# Altium PCB AVR精简学习板.PcbDoc (part 9 of 10)
Units mm, origin at the board's own origin, x right, y up, seen from the top; angles counter-clockwise.
Board outline 152.4 x 101.6 mm, 2 copper layers (Top Layer, Bottom Layer); 44 components, 51 nets, 211 pads, 6 vias.
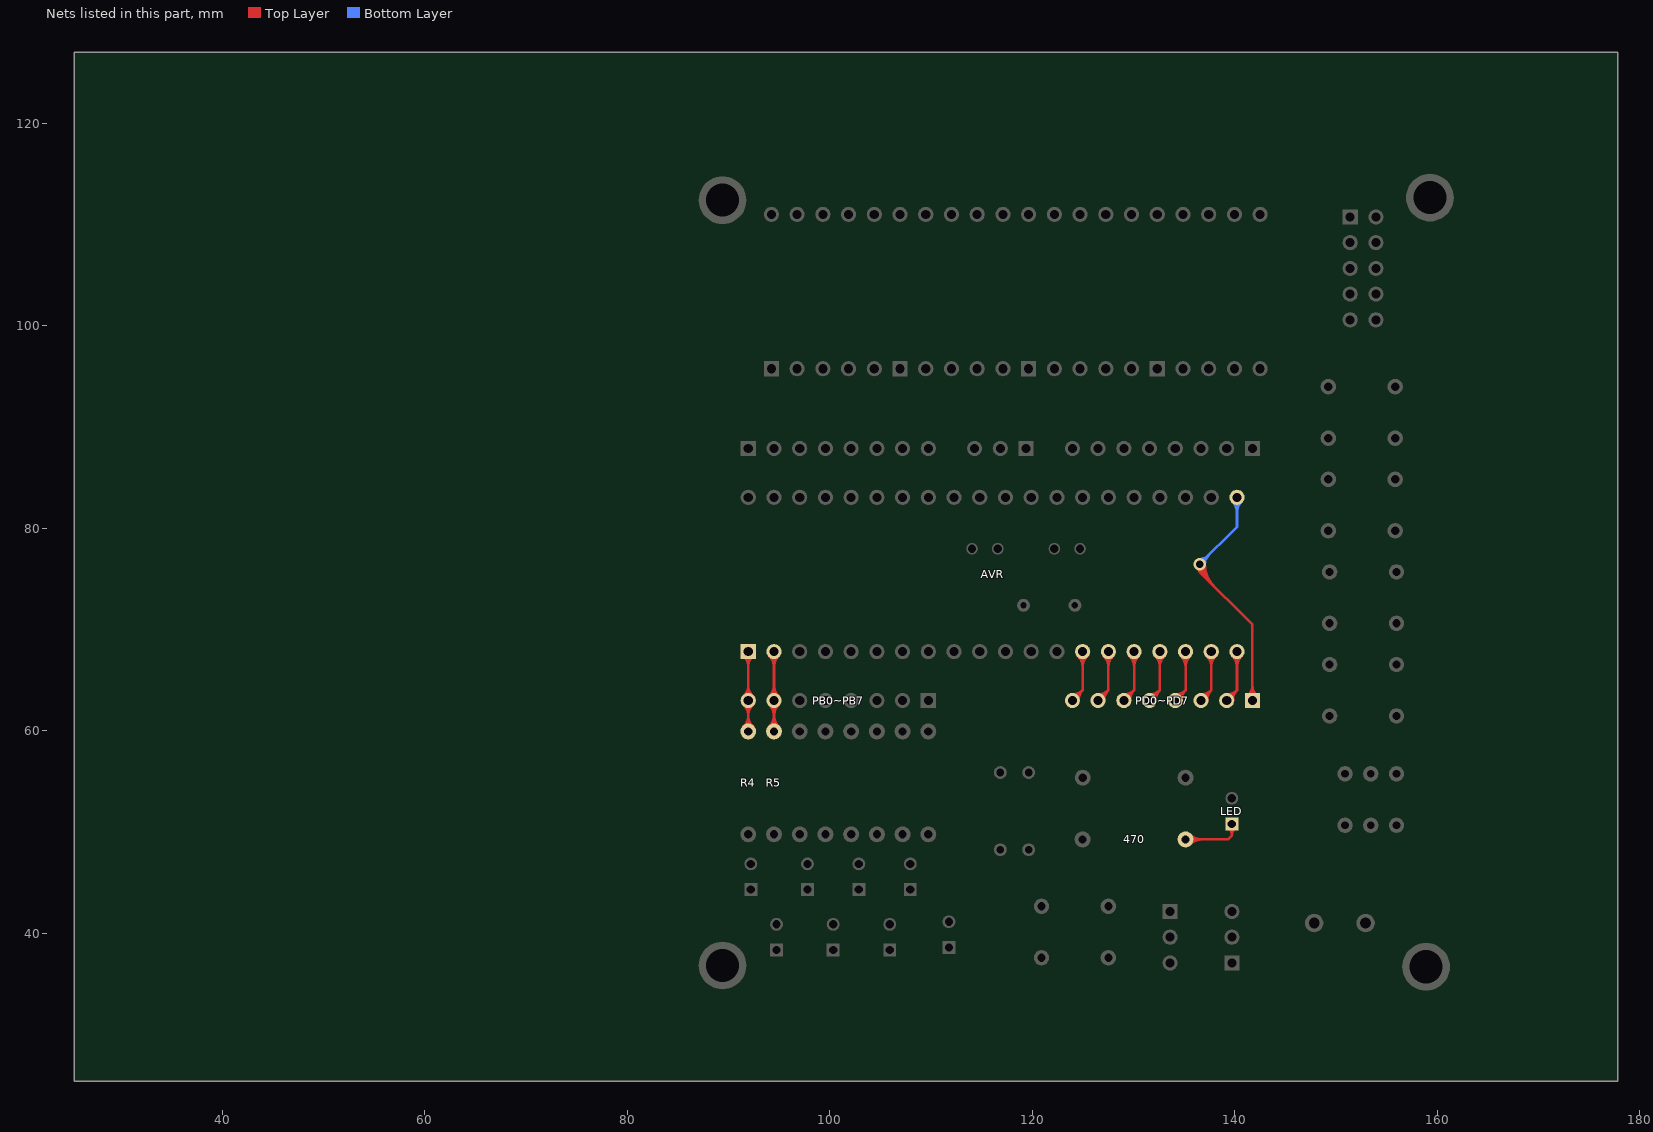
[diagram p9: the nets of this part, all layers, seen from the top]

## Via types
v1: diameter 1.27, hole 0.711, Top Layer to Bottom Layer, 6 vias

## Nets (pads, with @x,y where several pads share a name; then routed paths per layer and width w, separated by ;. In a path a pad name is that pad's centre, name@x,y a point inside that pad or via, vN(x,y) a via of type N, cw(c..) or ccw(c..) an arc to the next point about the centre after c; other vN are vias at no path point) (continued)
NetJP2_7: AVR.2 PB0~PB7.7 R5.2 | length 115.2
  Top Layer w0.254: AVR.2@94.488,67.818 PB0~PB7.7@94.488,62.992 PB0~PB7.7@94.488,62.992 R5.2@94.489,59.94 ; R5.2@94.022,60.407 ccw(c92.895,61.535) 94.489,61.535 ; R5.2@94.022,60.407 ccw(c92.895,61.535) 94.489,61.535 ; R5.2@94.022,60.407 ccw(c92.895,61.535) 94.489,61.535 ; R5.2@94.022,60.407 ccw(c92.895,61.535) 94.489,61.535 ; R5.2@94.022,60.407 ccw(c92.895,61.535) 94.489,61.535 ; R5.2@94.022,60.407 ccw(c92.895,61.535) 94.489,61.535 ; R5.2@94.022,60.407 ccw(c92.895,61.535) 94.489,61.535 ; PB0~PB7.7@94.047,62.551 cw(c92.982,61.486) 94.489,61.486 ; PB0~PB7.7@94.047,62.551 cw(c92.982,61.486) 94.489,61.486 ; PB0~PB7.7@94.047,62.551 cw(c92.982,61.486) 94.489,61.486 ; PB0~PB7.7@94.047,62.551 cw(c92.982,61.486) 94.489,61.486 ; PB0~PB7.7@94.047,62.551 cw(c92.982,61.486) 94.489,61.486 ; PB0~PB7.7@94.047,62.551 cw(c92.982,61.486) 94.489,61.486 ; PB0~PB7.7@94.047,62.551 cw(c92.982,61.486) 94.489,61.486 ; PB0~PB7.7@94.047,63.433 ccw(c92.984,64.496) 94.488,64.496 ; PB0~PB7.7@94.047,63.433 ccw(c92.984,64.496) 94.488,64.496 ; PB0~PB7.7@94.047,63.433 ccw(c92.984,64.496) 94.488,64.496 ; PB0~PB7.7@94.047,63.433 ccw(c92.984,64.496) 94.488,64.496 ; PB0~PB7.7@94.047,63.433 ccw(c92.984,64.496) 94.488,64.496 ; PB0~PB7.7@94.047,63.433 ccw(c92.984,64.496) 94.488,64.496 ; PB0~PB7.7@94.047,63.433 ccw(c92.984,64.496) 94.488,64.496 ; AVR.2@94.047,67.377 cw(c92.984,66.314) 94.488,66.314 ; AVR.2@94.047,67.377 cw(c92.984,66.314) 94.488,66.314 ; AVR.2@94.047,67.377 cw(c92.984,66.314) 94.488,66.314 ; AVR.2@94.047,67.377 cw(c92.984,66.314) 94.488,66.314 ; AVR.2@94.047,67.377 cw(c92.984,66.314) 94.488,66.314 ; AVR.2@94.047,67.377 cw(c92.984,66.314) 94.488,66.314 ; AVR.2@94.047,67.377 cw(c92.984,66.314) 94.488,66.314 ; R5.2@94.202,60.228 ccw(c93.508,60.921) 94.489,60.921 ; R5.2@94.202,60.228 ccw(c93.508,60.921) 94.489,60.921 ; R5.2@94.202,60.228 ccw(c93.508,60.921) 94.489,60.921 ; R5.2@94.202,60.228 ccw(c93.508,60.921) 94.489,60.921 ; R5.2@94.202,60.228 ccw(c93.508,60.921) 94.489,60.921 ; R5.2@94.202,60.228 ccw(c93.508,60.921) 94.489,60.921 ; R5.2@94.202,60.228 ccw(c93.508,60.921) 94.489,60.921 ; PB0~PB7.7@94.227,62.731 cw(c93.595,62.099) 94.489,62.099 ; PB0~PB7.7@94.227,62.731 cw(c93.595,62.099) 94.489,62.099 ; PB0~PB7.7@94.227,62.731 cw(c93.595,62.099) 94.489,62.099 ; PB0~PB7.7@94.227,62.731 cw(c93.595,62.099) 94.489,62.099 ; PB0~PB7.7@94.227,62.731 cw(c93.595,62.099) 94.489,62.099 ; PB0~PB7.7@94.227,62.731 cw(c93.595,62.099) 94.489,62.099 ; PB0~PB7.7@94.227,62.731 cw(c93.595,62.099) 94.489,62.099 ; PB0~PB7.7@94.227,63.253 ccw(c93.597,63.883) 94.488,63.883 ; PB0~PB7.7@94.227,63.253 ccw(c93.597,63.883) 94.488,63.883 ; PB0~PB7.7@94.227,63.253 ccw(c93.597,63.883) 94.488,63.883 ; PB0~PB7.7@94.227,63.253 ccw(c93.597,63.883) 94.488,63.883 ; PB0~PB7.7@94.227,63.253 ccw(c93.597,63.883) 94.488,63.883 ; PB0~PB7.7@94.227,63.253 ccw(c93.597,63.883) 94.488,63.883 ; PB0~PB7.7@94.227,63.253 ccw(c93.597,63.883) 94.488,63.883 ; AVR.2@94.227,67.557 cw(c93.597,66.927) 94.488,66.927 ; AVR.2@94.227,67.557 cw(c93.597,66.927) 94.488,66.927 ; AVR.2@94.227,67.557 cw(c93.597,66.927) 94.488,66.927 ; AVR.2@94.227,67.557 cw(c93.597,66.927) 94.488,66.927 ; AVR.2@94.227,67.557 cw(c93.597,66.927) 94.488,66.927 ; AVR.2@94.227,67.557 cw(c93.597,66.927) 94.488,66.927 ; AVR.2@94.227,67.557 cw(c93.597,66.927) 94.488,66.927 ; 94.488,63.883 ccw(c95.379,63.883) PB0~PB7.7@94.749,63.253 ; 94.488,63.883 ccw(c95.379,63.883) PB0~PB7.7@94.749,63.253 ; 94.488,63.883 ccw(c95.379,63.883) PB0~PB7.7@94.749,63.253 ; 94.488,63.883 ccw(c95.379,63.883) PB0~PB7.7@94.749,63.253 ; 94.488,63.883 ccw(c95.379,63.883) PB0~PB7.7@94.749,63.253 ; 94.488,63.883 ccw(c95.379,63.883) PB0~PB7.7@94.749,63.253 ; 94.488,63.883 ccw(c95.379,63.883) PB0~PB7.7@94.749,63.253 ; 94.488,64.496 ccw(c95.992,64.496) PB0~PB7.7@94.929,63.433 ; 94.488,64.496 ccw(c95.992,64.496) PB0~PB7.7@94.929,63.433 ; 94.488,64.496 ccw(c95.992,64.496) PB0~PB7.7@94.929,63.433 ; 94.488,64.496 ccw(c95.992,64.496) PB0~PB7.7@94.929,63.433 ; 94.488,64.496 ccw(c95.992,64.496) PB0~PB7.7@94.929,63.433 ; 94.488,64.496 ccw(c95.992,64.496) PB0~PB7.7@94.929,63.433 ; 94.488,64.496 ccw(c95.992,64.496) PB0~PB7.7@94.929,63.433 ; 94.488,66.314 cw(c95.992,66.314) AVR.2@94.929,67.377 ; 94.488,66.314 cw(c95.992,66.314) AVR.2@94.929,67.377 ; 94.488,66.314 cw(c95.992,66.314) AVR.2@94.929,67.377 ; 94.488,66.314 cw(c95.992,66.314) AVR.2@94.929,67.377 ; 94.488,66.314 cw(c95.992,66.314) AVR.2@94.929,67.377 ; 94.488,66.314 cw(c95.992,66.314) AVR.2@94.929,67.377 ; 94.488,66.314 cw(c95.992,66.314) AVR.2@94.929,67.377 ; 94.488,66.927 cw(c95.379,66.927) AVR.2@94.749,67.557 ; 94.488,66.927 cw(c95.379,66.927) AVR.2@94.749,67.557 ; 94.488,66.927 cw(c95.379,66.927) AVR.2@94.749,67.557 ; 94.488,66.927 cw(c95.379,66.927) AVR.2@94.749,67.557 ; 94.488,66.927 cw(c95.379,66.927) AVR.2@94.749,67.557 ; 94.488,66.927 cw(c95.379,66.927) AVR.2@94.749,67.557 ; 94.488,66.927 cw(c95.379,66.927) AVR.2@94.749,67.557 ; 94.489,60.921 ccw(c95.47,60.921) R5.2@94.776,60.228 ; 94.489,60.921 ccw(c95.47,60.921) R5.2@94.776,60.228 ; 94.489,60.921 ccw(c95.47,60.921) R5.2@94.776,60.228 ; 94.489,60.921 ccw(c95.47,60.921) R5.2@94.776,60.228 ; 94.489,60.921 ccw(c95.47,60.921) R5.2@94.776,60.228 ; 94.489,60.921 ccw(c95.47,60.921) R5.2@94.776,60.228 ; 94.489,60.921 ccw(c95.47,60.921) R5.2@94.776,60.228 ; 94.489,61.49 cw(c95.99,61.49) PB0~PB7.7@94.929,62.551 ; 94.489,61.49 cw(c95.99,61.49) PB0~PB7.7@94.929,62.551 ; 94.489,61.49 cw(c95.99,61.49) PB0~PB7.7@94.929,62.551 ; 94.489,61.49 cw(c95.99,61.49) PB0~PB7.7@94.929,62.551 ; 94.489,61.49 cw(c95.99,61.49) PB0~PB7.7@94.929,62.551 ; 94.489,61.49 cw(c95.99,61.49) PB0~PB7.7@94.929,62.551 ; 94.489,61.49 cw(c95.99,61.49) PB0~PB7.7@94.929,62.551 ; 94.489,61.535 ccw(c96.083,61.535) R5.2@94.956,60.407 ; 94.489,61.535 ccw(c96.083,61.535) R5.2@94.956,60.407 ; 94.489,61.535 ccw(c96.083,61.535) R5.2@94.956,60.407 ; 94.489,61.535 ccw(c96.083,61.535) R5.2@94.956,60.407 ; 94.489,61.535 ccw(c96.083,61.535) R5.2@94.956,60.407 ; 94.489,61.535 ccw(c96.083,61.535) R5.2@94.956,60.407 ; 94.489,61.535 ccw(c96.083,61.535) R5.2@94.956,60.407 ; 94.489,62.104 cw(c95.376,62.104) PB0~PB7.7@94.749,62.731 ; 94.489,62.104 cw(c95.376,62.104) PB0~PB7.7@94.749,62.731 ; 94.489,62.104 cw(c95.376,62.104) PB0~PB7.7@94.749,62.731 ; 94.489,62.104 cw(c95.376,62.104) PB0~PB7.7@94.749,62.731 ; 94.489,62.104 cw(c95.376,62.104) PB0~PB7.7@94.749,62.731 ; 94.489,62.104 cw(c95.376,62.104) PB0~PB7.7@94.749,62.731 ; 94.489,62.104 cw(c95.376,62.104) PB0~PB7.7@94.749,62.731
NetJP2_8: AVR.1 PB0~PB7.8 R4.2 | length 115.2
  Top Layer w0.254: AVR.1@91.948,67.818 PB0~PB7.8@91.948,62.992 PB0~PB7.8@91.948,62.992 R4.2@91.949,59.94 ; R4.2@91.482,60.407 ccw(c90.355,61.535) 91.949,61.535 ; R4.2@91.482,60.407 ccw(c90.355,61.535) 91.949,61.535 ; R4.2@91.482,60.407 ccw(c90.355,61.535) 91.949,61.535 ; R4.2@91.482,60.407 ccw(c90.355,61.535) 91.949,61.535 ; R4.2@91.482,60.407 ccw(c90.355,61.535) 91.949,61.535 ; R4.2@91.482,60.407 ccw(c90.355,61.535) 91.949,61.535 ; R4.2@91.482,60.407 ccw(c90.355,61.535) 91.949,61.535 ; PB0~PB7.8@91.507,62.551 cw(c90.442,61.486) 91.949,61.486 ; PB0~PB7.8@91.507,62.551 cw(c90.442,61.486) 91.949,61.486 ; PB0~PB7.8@91.507,62.551 cw(c90.442,61.486) 91.949,61.486 ; PB0~PB7.8@91.507,62.551 cw(c90.442,61.486) 91.949,61.486 ; PB0~PB7.8@91.507,62.551 cw(c90.442,61.486) 91.949,61.486 ; PB0~PB7.8@91.507,62.551 cw(c90.442,61.486) 91.949,61.486 ; PB0~PB7.8@91.507,62.551 cw(c90.442,61.486) 91.949,61.486 ; PB0~PB7.8@91.507,63.433 ccw(c90.444,64.496) 91.948,64.496 ; PB0~PB7.8@91.507,63.433 ccw(c90.444,64.496) 91.948,64.496 ; PB0~PB7.8@91.507,63.433 ccw(c90.444,64.496) 91.948,64.496 ; PB0~PB7.8@91.507,63.433 ccw(c90.444,64.496) 91.948,64.496 ; PB0~PB7.8@91.507,63.433 ccw(c90.444,64.496) 91.948,64.496 ; PB0~PB7.8@91.507,63.433 ccw(c90.444,64.496) 91.948,64.496 ; PB0~PB7.8@91.507,63.433 ccw(c90.444,64.496) 91.948,64.496 ; AVR.1@91.507,67.377 cw(c90.444,66.314) 91.948,66.314 ; AVR.1@91.507,67.377 cw(c90.444,66.314) 91.948,66.314 ; AVR.1@91.507,67.377 cw(c90.444,66.314) 91.948,66.314 ; AVR.1@91.507,67.377 cw(c90.444,66.314) 91.948,66.314 ; AVR.1@91.507,67.377 cw(c90.444,66.314) 91.948,66.314 ; AVR.1@91.507,67.377 cw(c90.444,66.314) 91.948,66.314 ; AVR.1@91.507,67.377 cw(c90.444,66.314) 91.948,66.314 ; R4.2@91.662,60.228 ccw(c90.968,60.921) 91.949,60.921 ; R4.2@91.662,60.228 ccw(c90.968,60.921) 91.949,60.921 ; R4.2@91.662,60.228 ccw(c90.968,60.921) 91.949,60.921 ; R4.2@91.662,60.228 ccw(c90.968,60.921) 91.949,60.921 ; R4.2@91.662,60.228 ccw(c90.968,60.921) 91.949,60.921 ; R4.2@91.662,60.228 ccw(c90.968,60.921) 91.949,60.921 ; R4.2@91.662,60.228 ccw(c90.968,60.921) 91.949,60.921 ; PB0~PB7.8@91.687,62.731 cw(c91.055,62.099) 91.949,62.099 ; PB0~PB7.8@91.687,62.731 cw(c91.055,62.099) 91.949,62.099 ; PB0~PB7.8@91.687,62.731 cw(c91.055,62.099) 91.949,62.099 ; PB0~PB7.8@91.687,62.731 cw(c91.055,62.099) 91.949,62.099 ; PB0~PB7.8@91.687,62.731 cw(c91.055,62.099) 91.949,62.099 ; PB0~PB7.8@91.687,62.731 cw(c91.055,62.099) 91.949,62.099 ; PB0~PB7.8@91.687,62.731 cw(c91.055,62.099) 91.949,62.099 ; PB0~PB7.8@91.687,63.253 ccw(c91.057,63.883) 91.948,63.883 ; PB0~PB7.8@91.687,63.253 ccw(c91.057,63.883) 91.948,63.883 ; PB0~PB7.8@91.687,63.253 ccw(c91.057,63.883) 91.948,63.883 ; PB0~PB7.8@91.687,63.253 ccw(c91.057,63.883) 91.948,63.883 ; PB0~PB7.8@91.687,63.253 ccw(c91.057,63.883) 91.948,63.883 ; PB0~PB7.8@91.687,63.253 ccw(c91.057,63.883) 91.948,63.883 ; PB0~PB7.8@91.687,63.253 ccw(c91.057,63.883) 91.948,63.883 ; AVR.1@91.687,67.557 cw(c91.057,66.927) 91.948,66.927 ; AVR.1@91.687,67.557 cw(c91.057,66.927) 91.948,66.927 ; AVR.1@91.687,67.557 cw(c91.057,66.927) 91.948,66.927 ; AVR.1@91.687,67.557 cw(c91.057,66.927) 91.948,66.927 ; AVR.1@91.687,67.557 cw(c91.057,66.927) 91.948,66.927 ; AVR.1@91.687,67.557 cw(c91.057,66.927) 91.948,66.927 ; AVR.1@91.687,67.557 cw(c91.057,66.927) 91.948,66.927 ; 91.948,63.883 ccw(c92.839,63.883) PB0~PB7.8@92.209,63.253 ; 91.948,63.883 ccw(c92.839,63.883) PB0~PB7.8@92.209,63.253 ; 91.948,63.883 ccw(c92.839,63.883) PB0~PB7.8@92.209,63.253 ; 91.948,63.883 ccw(c92.839,63.883) PB0~PB7.8@92.209,63.253 ; 91.948,63.883 ccw(c92.839,63.883) PB0~PB7.8@92.209,63.253 ; 91.948,63.883 ccw(c92.839,63.883) PB0~PB7.8@92.209,63.253 ; 91.948,63.883 ccw(c92.839,63.883) PB0~PB7.8@92.209,63.253 ; 91.948,64.496 ccw(c93.452,64.496) PB0~PB7.8@92.389,63.433 ; 91.948,64.496 ccw(c93.452,64.496) PB0~PB7.8@92.389,63.433 ; 91.948,64.496 ccw(c93.452,64.496) PB0~PB7.8@92.389,63.433 ; 91.948,64.496 ccw(c93.452,64.496) PB0~PB7.8@92.389,63.433 ; 91.948,64.496 ccw(c93.452,64.496) PB0~PB7.8@92.389,63.433 ; 91.948,64.496 ccw(c93.452,64.496) PB0~PB7.8@92.389,63.433 ; 91.948,64.496 ccw(c93.452,64.496) PB0~PB7.8@92.389,63.433 ; 91.948,66.314 cw(c93.452,66.314) AVR.1@92.389,67.377 ; 91.948,66.314 cw(c93.452,66.314) AVR.1@92.389,67.377 ; 91.948,66.314 cw(c93.452,66.314) AVR.1@92.389,67.377 ; 91.948,66.314 cw(c93.452,66.314) AVR.1@92.389,67.377 ; 91.948,66.314 cw(c93.452,66.314) AVR.1@92.389,67.377 ; 91.948,66.314 cw(c93.452,66.314) AVR.1@92.389,67.377 ; 91.948,66.314 cw(c93.452,66.314) AVR.1@92.389,67.377 ; 91.948,66.927 cw(c92.839,66.927) AVR.1@92.209,67.557 ; 91.948,66.927 cw(c92.839,66.927) AVR.1@92.209,67.557 ; 91.948,66.927 cw(c92.839,66.927) AVR.1@92.209,67.557 ; 91.948,66.927 cw(c92.839,66.927) AVR.1@92.209,67.557 ; 91.948,66.927 cw(c92.839,66.927) AVR.1@92.209,67.557 ; 91.948,66.927 cw(c92.839,66.927) AVR.1@92.209,67.557 ; 91.948,66.927 cw(c92.839,66.927) AVR.1@92.209,67.557 ; 91.949,60.921 ccw(c92.93,60.921) R4.2@92.236,60.228 ; 91.949,60.921 ccw(c92.93,60.921) R4.2@92.236,60.228 ; 91.949,60.921 ccw(c92.93,60.921) R4.2@92.236,60.228 ; 91.949,60.921 ccw(c92.93,60.921) R4.2@92.236,60.228 ; 91.949,60.921 ccw(c92.93,60.921) R4.2@92.236,60.228 ; 91.949,60.921 ccw(c92.93,60.921) R4.2@92.236,60.228 ; 91.949,60.921 ccw(c92.93,60.921) R4.2@92.236,60.228 ; 91.949,61.49 cw(c93.45,61.49) PB0~PB7.8@92.389,62.551 ; 91.949,61.49 cw(c93.45,61.49) PB0~PB7.8@92.389,62.551 ; 91.949,61.49 cw(c93.45,61.49) PB0~PB7.8@92.389,62.551 ; 91.949,61.49 cw(c93.45,61.49) PB0~PB7.8@92.389,62.551 ; 91.949,61.49 cw(c93.45,61.49) PB0~PB7.8@92.389,62.551 ; 91.949,61.49 cw(c93.45,61.49) PB0~PB7.8@92.389,62.551 ; 91.949,61.49 cw(c93.45,61.49) PB0~PB7.8@92.389,62.551 ; 91.949,61.535 ccw(c93.543,61.535) R4.2@92.416,60.407 ; 91.949,61.535 ccw(c93.543,61.535) R4.2@92.416,60.407 ; 91.949,61.535 ccw(c93.543,61.535) R4.2@92.416,60.407 ; 91.949,61.535 ccw(c93.543,61.535) R4.2@92.416,60.407 ; 91.949,61.535 ccw(c93.543,61.535) R4.2@92.416,60.407 ; 91.949,61.535 ccw(c93.543,61.535) R4.2@92.416,60.407 ; 91.949,61.535 ccw(c93.543,61.535) R4.2@92.416,60.407 ; 91.949,62.104 cw(c92.836,62.104) PB0~PB7.8@92.209,62.731 ; 91.949,62.104 cw(c92.836,62.104) PB0~PB7.8@92.209,62.731 ; 91.949,62.104 cw(c92.836,62.104) PB0~PB7.8@92.209,62.731 ; 91.949,62.104 cw(c92.836,62.104) PB0~PB7.8@92.209,62.731 ; 91.949,62.104 cw(c92.836,62.104) PB0~PB7.8@92.209,62.731 ; 91.949,62.104 cw(c92.836,62.104) PB0~PB7.8@92.209,62.731 ; 91.949,62.104 cw(c92.836,62.104) PB0~PB7.8@92.209,62.731
NetJP3_1: AVR.21 PD0~PD7.1 | length 147.6
  Top Layer w0.254: PD0~PD7.1@141.732,62.992 141.732,70.485 136.525,75.692 ; v1@136.271,76.454 ccw(c137.497,76.454) 136.63,75.587 ; v1@136.271,76.454 ccw(c137.497,76.454) 136.63,75.587 ; v1@136.271,76.454 ccw(c137.497,76.454) 136.63,75.587 ; v1@136.271,76.454 ccw(c137.497,76.454) 136.63,75.587 ; v1@136.271,76.454 ccw(c137.497,76.454) 136.63,75.587 ; v1@136.271,76.454 ccw(c137.497,76.454) 136.63,75.587 ; v1@136.271,76.454 ccw(c137.497,76.454) 136.63,75.587 ; v1@136.33,75.985 cw(c136.208,75.692) 136.525,75.692 ; v1@136.33,75.985 cw(c136.208,75.692) 136.525,75.692 ; v1@136.33,75.985 cw(c136.208,75.692) 136.525,75.692 ; v1@136.33,75.985 cw(c136.208,75.692) 136.525,75.692 ; v1@136.33,75.985 cw(c136.208,75.692) 136.525,75.692 ; v1@136.33,75.985 cw(c136.208,75.692) 136.525,75.692 ; v1@136.33,75.985 cw(c136.208,75.692) 136.525,75.692 ; v1@136.33,75.985 cw(c136.208,75.692) 136.525,75.692 ; v1@136.33,75.985 cw(c136.208,75.692) 136.525,75.692 ; v1@136.33,75.985 cw(c136.208,75.692) 136.525,75.692 ; v1@136.33,75.985 cw(c136.208,75.692) 136.525,75.692 ; v1@136.33,75.985 cw(c136.208,75.692) 136.525,75.692 ; v1@136.33,75.985 cw(c136.208,75.692) 136.525,75.692 ; v1@136.33,75.985 cw(c136.208,75.692) 136.525,75.692 ; 136.525,75.692 cw(c136.842,75.692) v1@136.72,75.985 ; 136.525,75.692 cw(c136.842,75.692) v1@136.72,75.985 ; 136.525,75.692 cw(c136.842,75.692) v1@136.72,75.985 ; 136.525,75.692 cw(c136.842,75.692) v1@136.72,75.985 ; 136.525,75.692 cw(c136.842,75.692) v1@136.72,75.985 ; 136.525,75.692 cw(c136.842,75.692) v1@136.72,75.985 ; 136.525,75.692 cw(c136.842,75.692) v1@136.72,75.985 ; 136.525,75.692 cw(c136.842,75.692) v1@136.72,75.985 ; 136.525,75.692 cw(c136.842,75.692) v1@136.72,75.985 ; 136.525,75.692 cw(c136.842,75.692) v1@136.72,75.985 ; 136.525,75.692 cw(c136.842,75.692) v1@136.72,75.985 ; 136.525,75.692 cw(c136.842,75.692) v1@136.72,75.985 ; 136.525,75.692 cw(c136.842,75.692) v1@136.72,75.985 ; 136.525,75.692 cw(c136.842,75.692) v1@136.72,75.985 ; 136.525,75.692 v1(136.525,76.454) ; v1(136.525,76.454) ccw(c138.365,76.454) 137.064,75.153 ; v1(136.525,76.454) ccw(c138.365,76.454) 137.064,75.153 ; v1(136.525,76.454) ccw(c138.365,76.454) 137.064,75.153 ; v1(136.525,76.454) ccw(c138.365,76.454) 137.064,75.153 ; v1(136.525,76.454) ccw(c138.365,76.454) 137.064,75.153 ; v1(136.525,76.454) ccw(c138.365,76.454) 137.064,75.153 ; v1(136.525,76.454) ccw(c138.365,76.454) 137.064,75.153 ; v1@136.779,76.454 ccw(c139.232,76.454) 137.497,74.72 ; v1@136.779,76.454 ccw(c139.232,76.454) 137.497,74.72 ; v1@136.779,76.454 ccw(c139.232,76.454) 137.497,74.72 ; v1@136.779,76.454 ccw(c139.232,76.454) 137.497,74.72 ; v1@136.779,76.454 ccw(c139.232,76.454) 137.497,74.72 ; v1@136.779,76.454 ccw(c139.232,76.454) 137.497,74.72 ; v1@136.779,76.454 ccw(c139.232,76.454) 137.497,74.72 ; v1@137.033,76.454 ccw(c140.099,76.454) 137.931,74.286 ; v1@137.033,76.454 ccw(c140.099,76.454) 137.931,74.286 ; v1@137.033,76.454 ccw(c140.099,76.454) 137.931,74.286 ; v1@137.033,76.454 ccw(c140.099,76.454) 137.931,74.286 ; v1@137.033,76.454 ccw(c140.099,76.454) 137.931,74.286 ; v1@137.033,76.454 ccw(c140.099,76.454) 137.931,74.286 ; v1@137.033,76.454 ccw(c140.099,76.454) 137.931,74.286 ; PD0~PD7.1@141.291,63.433 ccw(c140.228,64.496) 141.732,64.496 ; PD0~PD7.1@141.291,63.433 ccw(c140.228,64.496) 141.732,64.496 ; PD0~PD7.1@141.291,63.433 ccw(c140.228,64.496) 141.732,64.496 ; PD0~PD7.1@141.291,63.433 ccw(c140.228,64.496) 141.732,64.496 ; PD0~PD7.1@141.291,63.433 ccw(c140.228,64.496) 141.732,64.496 ; PD0~PD7.1@141.291,63.433 ccw(c140.228,64.496) 141.732,64.496 ; PD0~PD7.1@141.291,63.433 ccw(c140.228,64.496) 141.732,64.496 ; PD0~PD7.1@141.471,63.253 ccw(c140.841,63.883) 141.732,63.883 ; PD0~PD7.1@141.471,63.253 ccw(c140.841,63.883) 141.732,63.883 ; PD0~PD7.1@141.471,63.253 ccw(c140.841,63.883) 141.732,63.883 ; PD0~PD7.1@141.471,63.253 ccw(c140.841,63.883) 141.732,63.883 ; PD0~PD7.1@141.471,63.253 ccw(c140.841,63.883) 141.732,63.883 ; PD0~PD7.1@141.471,63.253 ccw(c140.841,63.883) 141.732,63.883 ; PD0~PD7.1@141.471,63.253 ccw(c140.841,63.883) 141.732,63.883 ; 141.732,63.883 ccw(c142.623,63.883) PD0~PD7.1@141.993,63.253 ; 141.732,63.883 ccw(c142.623,63.883) PD0~PD7.1@141.993,63.253 ; 141.732,63.883 ccw(c142.623,63.883) PD0~PD7.1@141.993,63.253 ; 141.732,63.883 ccw(c142.623,63.883) PD0~PD7.1@141.993,63.253 ; 141.732,63.883 ccw(c142.623,63.883) PD0~PD7.1@141.993,63.253 ; 141.732,63.883 ccw(c142.623,63.883) PD0~PD7.1@141.993,63.253 ; 141.732,63.883 ccw(c142.623,63.883) PD0~PD7.1@141.993,63.253 ; 141.732,64.496 ccw(c143.236,64.496) PD0~PD7.1@142.173,63.433 ; 141.732,64.496 ccw(c143.236,64.496) PD0~PD7.1@142.173,63.433 ; 141.732,64.496 ccw(c143.236,64.496) PD0~PD7.1@142.173,63.433 ; 141.732,64.496 ccw(c143.236,64.496) PD0~PD7.1@142.173,63.433 ; 141.732,64.496 ccw(c143.236,64.496) PD0~PD7.1@142.173,63.433 ; 141.732,64.496 ccw(c143.236,64.496) PD0~PD7.1@142.173,63.433 ; 141.732,64.496 ccw(c143.236,64.496) PD0~PD7.1@142.173,63.433
  Bottom Layer w0.254: v1(136.525,76.454) 140.208,80.137 AVR.21@140.208,83.058 ; v1@136.525,76.962 ccw(c136.525,78.188) 137.392,77.321 ; v1@136.525,76.962 ccw(c136.525,78.188) 137.392,77.321 ; v1@136.525,76.962 ccw(c136.525,78.188) 137.392,77.321 ; v1@136.525,76.962 ccw(c136.525,78.188) 137.392,77.321 ; v1@136.525,76.962 ccw(c136.525,78.188) 137.392,77.321 ; v1@136.525,76.962 ccw(c136.525,78.188) 137.392,77.321 ; v1@136.525,76.962 ccw(c136.525,78.188) 137.392,77.321 ; v1@137.033,76.454 cw(c138.259,76.454) 137.392,77.321 ; v1@137.033,76.454 cw(c138.259,76.454) 137.392,77.321 ; v1@137.033,76.454 cw(c138.259,76.454) 137.392,77.321 ; v1@137.033,76.454 cw(c138.259,76.454) 137.392,77.321 ; v1@137.033,76.454 cw(c138.259,76.454) 137.392,77.321 ; v1@137.033,76.454 cw(c138.259,76.454) 137.392,77.321 ; v1@137.033,76.454 cw(c138.259,76.454) 137.392,77.321 ; AVR.21@139.767,82.617 cw(c138.704,81.554) 140.208,81.554 ; AVR.21@139.767,82.617 cw(c138.704,81.554) 140.208,81.554 ; AVR.21@139.767,82.617 cw(c138.704,81.554) 140.208,81.554 ; AVR.21@139.767,82.617 cw(c138.704,81.554) 140.208,81.554 ; AVR.21@139.767,82.617 cw(c138.704,81.554) 140.208,81.554 ; AVR.21@139.767,82.617 cw(c138.704,81.554) 140.208,81.554 ; AVR.21@139.767,82.617 cw(c138.704,81.554) 140.208,81.554 ; AVR.21@139.947,82.797 cw(c139.317,82.167) 140.208,82.167 ; AVR.21@139.947,82.797 cw(c139.317,82.167) 140.208,82.167 ; AVR.21@139.947,82.797 cw(c139.317,82.167) 140.208,82.167 ; AVR.21@139.947,82.797 cw(c139.317,82.167) 140.208,82.167 ; AVR.21@139.947,82.797 cw(c139.317,82.167) 140.208,82.167 ; AVR.21@139.947,82.797 cw(c139.317,82.167) 140.208,82.167 ; AVR.21@139.947,82.797 cw(c139.317,82.167) 140.208,82.167 ; 140.208,81.554 cw(c141.712,81.554) AVR.21@140.649,82.617 ; 140.208,81.554 cw(c141.712,81.554) AVR.21@140.649,82.617 ; 140.208,81.554 cw(c141.712,81.554) AVR.21@140.649,82.617 ; 140.208,81.554 cw(c141.712,81.554) AVR.21@140.649,82.617 ; 140.208,81.554 cw(c141.712,81.554) AVR.21@140.649,82.617 ; 140.208,81.554 cw(c141.712,81.554) AVR.21@140.649,82.617 ; 140.208,81.554 cw(c141.712,81.554) AVR.21@140.649,82.617 ; 140.208,82.167 cw(c141.099,82.167) AVR.21@140.469,82.797 ; 140.208,82.167 cw(c141.099,82.167) AVR.21@140.469,82.797 ; 140.208,82.167 cw(c141.099,82.167) AVR.21@140.469,82.797 ; 140.208,82.167 cw(c141.099,82.167) AVR.21@140.469,82.797 ; 140.208,82.167 cw(c141.099,82.167) AVR.21@140.469,82.797 ; 140.208,82.167 cw(c141.099,82.167) AVR.21@140.469,82.797 ; 140.208,82.167 cw(c141.099,82.167) AVR.21@140.469,82.797
NetJP3_2: AVR.20 PD0~PD7.2 | length 56.1
  Top Layer w0.254: PD0~PD7.2@139.192,62.992 140.208,64.008 ; AVR.20@140.208,67.818 140.208,64.008 ; PD0~PD7.2@139.204,63.361 ccw(c139.23,64.157) 139.794,63.594 ; PD0~PD7.2@139.204,63.361 ccw(c139.23,64.157) 139.794,63.594 ; PD0~PD7.2@139.204,63.361 ccw(c139.23,64.157) 139.794,63.594 ; PD0~PD7.2@139.204,63.361 ccw(c139.23,64.157) 139.794,63.594 ; PD0~PD7.2@139.204,63.361 ccw(c139.23,64.157) 139.794,63.594 ; PD0~PD7.2@139.204,63.361 ccw(c139.23,64.157) 139.794,63.594 ; PD0~PD7.2@139.204,63.361 ccw(c139.23,64.157) 139.794,63.594 ; PD0~PD7.2@139.212,63.615 ccw(c139.257,64.959) 140.208,64.008 ; PD0~PD7.2@139.212,63.615 ccw(c139.257,64.959) 140.208,64.008 ; PD0~PD7.2@139.212,63.615 ccw(c139.257,64.959) 140.208,64.008 ; PD0~PD7.2@139.212,63.615 ccw(c139.257,64.959) 140.208,64.008 ; PD0~PD7.2@139.212,63.615 ccw(c139.257,64.959) 140.208,64.008 ; PD0~PD7.2@139.212,63.615 ccw(c139.257,64.959) 140.208,64.008 ; PD0~PD7.2@139.212,63.615 ccw(c139.257,64.959) 140.208,64.008 ; PD0~PD7.2@139.561,63.004 cw(c140.357,63.03) 139.794,63.594 ; PD0~PD7.2@139.561,63.004 cw(c140.357,63.03) 139.794,63.594 ; PD0~PD7.2@139.561,63.004 cw(c140.357,63.03) 139.794,63.594 ; PD0~PD7.2@139.561,63.004 cw(c140.357,63.03) 139.794,63.594 ; PD0~PD7.2@139.561,63.004 cw(c140.357,63.03) 139.794,63.594 ; PD0~PD7.2@139.561,63.004 cw(c140.357,63.03) 139.794,63.594 ; PD0~PD7.2@139.561,63.004 cw(c140.357,63.03) 139.794,63.594 ; AVR.20@139.767,67.377 cw(c138.704,66.314) 140.208,66.314 ; AVR.20@139.767,67.377 cw(c138.704,66.314) 140.208,66.314 ; AVR.20@139.767,67.377 cw(c138.704,66.314) 140.208,66.314 ; AVR.20@139.767,67.377 cw(c138.704,66.314) 140.208,66.314 ; AVR.20@139.767,67.377 cw(c138.704,66.314) 140.208,66.314 ; AVR.20@139.767,67.377 cw(c138.704,66.314) 140.208,66.314 ; AVR.20@139.767,67.377 cw(c138.704,66.314) 140.208,66.314 ; PD0~PD7.2@139.815,63.012 cw(c141.159,63.057) 140.208,64.008 ; PD0~PD7.2@139.815,63.012 cw(c141.159,63.057) 140.208,64.008 ; PD0~PD7.2@139.815,63.012 cw(c141.159,63.057) 140.208,64.008 ; PD0~PD7.2@139.815,63.012 cw(c141.159,63.057) 140.208,64.008 ; PD0~PD7.2@139.815,63.012 cw(c141.159,63.057) 140.208,64.008 ; PD0~PD7.2@139.815,63.012 cw(c141.159,63.057) 140.208,64.008 ; PD0~PD7.2@139.815,63.012 cw(c141.159,63.057) 140.208,64.008 ; AVR.20@139.947,67.557 cw(c139.317,66.927) 140.208,66.927 ; AVR.20@139.947,67.557 cw(c139.317,66.927) 140.208,66.927 ; AVR.20@139.947,67.557 cw(c139.317,66.927) 140.208,66.927 ; AVR.20@139.947,67.557 cw(c139.317,66.927) 140.208,66.927 ; AVR.20@139.947,67.557 cw(c139.317,66.927) 140.208,66.927 ; AVR.20@139.947,67.557 cw(c139.317,66.927) 140.208,66.927 ; AVR.20@139.947,67.557 cw(c139.317,66.927) 140.208,66.927 ; 140.208,66.314 cw(c141.712,66.314) AVR.20@140.649,67.377 ; 140.208,66.314 cw(c141.712,66.314) AVR.20@140.649,67.377 ; 140.208,66.314 cw(c141.712,66.314) AVR.20@140.649,67.377 ; 140.208,66.314 cw(c141.712,66.314) AVR.20@140.649,67.377 ; 140.208,66.314 cw(c141.712,66.314) AVR.20@140.649,67.377 ; 140.208,66.314 cw(c141.712,66.314) AVR.20@140.649,67.377 ; 140.208,66.314 cw(c141.712,66.314) AVR.20@140.649,67.377 ; 140.208,66.927 cw(c141.099,66.927) AVR.20@140.469,67.557 ; 140.208,66.927 cw(c141.099,66.927) AVR.20@140.469,67.557 ; 140.208,66.927 cw(c141.099,66.927) AVR.20@140.469,67.557 ; 140.208,66.927 cw(c141.099,66.927) AVR.20@140.469,67.557 ; 140.208,66.927 cw(c141.099,66.927) AVR.20@140.469,67.557 ; 140.208,66.927 cw(c141.099,66.927) AVR.20@140.469,67.557 ; 140.208,66.927 cw(c141.099,66.927) AVR.20@140.469,67.557
NetJP3_3: AVR.19 PD0~PD7.3 | length 56.1
  Top Layer w0.254: PD0~PD7.3@136.652,62.992 137.668,64.008 ; AVR.19@137.668,67.818 137.668,64.008 ; PD0~PD7.3@136.664,63.361 ccw(c136.69,64.157) 137.254,63.594 ; PD0~PD7.3@136.664,63.361 ccw(c136.69,64.157) 137.254,63.594 ; PD0~PD7.3@136.664,63.361 ccw(c136.69,64.157) 137.254,63.594 ; PD0~PD7.3@136.664,63.361 ccw(c136.69,64.157) 137.254,63.594 ; PD0~PD7.3@136.664,63.361 ccw(c136.69,64.157) 137.254,63.594 ; PD0~PD7.3@136.664,63.361 ccw(c136.69,64.157) 137.254,63.594 ; PD0~PD7.3@136.664,63.361 ccw(c136.69,64.157) 137.254,63.594 ; PD0~PD7.3@136.672,63.615 ccw(c136.717,64.959) 137.668,64.008 ; PD0~PD7.3@136.672,63.615 ccw(c136.717,64.959) 137.668,64.008 ; PD0~PD7.3@136.672,63.615 ccw(c136.717,64.959) 137.668,64.008 ; PD0~PD7.3@136.672,63.615 ccw(c136.717,64.959) 137.668,64.008 ; PD0~PD7.3@136.672,63.615 ccw(c136.717,64.959) 137.668,64.008 ; PD0~PD7.3@136.672,63.615 ccw(c136.717,64.959) 137.668,64.008 ; PD0~PD7.3@136.672,63.615 ccw(c136.717,64.959) 137.668,64.008 ; PD0~PD7.3@137.021,63.004 cw(c137.817,63.03) 137.254,63.594 ; PD0~PD7.3@137.021,63.004 cw(c137.817,63.03) 137.254,63.594 ; PD0~PD7.3@137.021,63.004 cw(c137.817,63.03) 137.254,63.594 ; PD0~PD7.3@137.021,63.004 cw(c137.817,63.03) 137.254,63.594 ; PD0~PD7.3@137.021,63.004 cw(c137.817,63.03) 137.254,63.594 ; PD0~PD7.3@137.021,63.004 cw(c137.817,63.03) 137.254,63.594 ; PD0~PD7.3@137.021,63.004 cw(c137.817,63.03) 137.254,63.594 ; AVR.19@137.227,67.377 cw(c136.164,66.314) 137.668,66.314 ; AVR.19@137.227,67.377 cw(c136.164,66.314) 137.668,66.314 ; AVR.19@137.227,67.377 cw(c136.164,66.314) 137.668,66.314 ; AVR.19@137.227,67.377 cw(c136.164,66.314) 137.668,66.314 ; AVR.19@137.227,67.377 cw(c136.164,66.314) 137.668,66.314 ; AVR.19@137.227,67.377 cw(c136.164,66.314) 137.668,66.314 ; AVR.19@137.227,67.377 cw(c136.164,66.314) 137.668,66.314 ; PD0~PD7.3@137.275,63.012 cw(c138.619,63.057) 137.668,64.008 ; PD0~PD7.3@137.275,63.012 cw(c138.619,63.057) 137.668,64.008 ; PD0~PD7.3@137.275,63.012 cw(c138.619,63.057) 137.668,64.008 ; PD0~PD7.3@137.275,63.012 cw(c138.619,63.057) 137.668,64.008 ; PD0~PD7.3@137.275,63.012 cw(c138.619,63.057) 137.668,64.008 ; PD0~PD7.3@137.275,63.012 cw(c138.619,63.057) 137.668,64.008 ; PD0~PD7.3@137.275,63.012 cw(c138.619,63.057) 137.668,64.008 ; AVR.19@137.407,67.557 cw(c136.777,66.927) 137.668,66.927 ; AVR.19@137.407,67.557 cw(c136.777,66.927) 137.668,66.927 ; AVR.19@137.407,67.557 cw(c136.777,66.927) 137.668,66.927 ; AVR.19@137.407,67.557 cw(c136.777,66.927) 137.668,66.927 ; AVR.19@137.407,67.557 cw(c136.777,66.927) 137.668,66.927 ; AVR.19@137.407,67.557 cw(c136.777,66.927) 137.668,66.927 ; AVR.19@137.407,67.557 cw(c136.777,66.927) 137.668,66.927 ; 137.668,66.314 cw(c139.172,66.314) AVR.19@138.109,67.377 ; 137.668,66.314 cw(c139.172,66.314) AVR.19@138.109,67.377 ; 137.668,66.314 cw(c139.172,66.314) AVR.19@138.109,67.377 ; 137.668,66.314 cw(c139.172,66.314) AVR.19@138.109,67.377 ; 137.668,66.314 cw(c139.172,66.314) AVR.19@138.109,67.377 ; 137.668,66.314 cw(c139.172,66.314) AVR.19@138.109,67.377 ; 137.668,66.314 cw(c139.172,66.314) AVR.19@138.109,67.377 ; 137.668,66.927 cw(c138.559,66.927) AVR.19@137.929,67.557 ; 137.668,66.927 cw(c138.559,66.927) AVR.19@137.929,67.557 ; 137.668,66.927 cw(c138.559,66.927) AVR.19@137.929,67.557 ; 137.668,66.927 cw(c138.559,66.927) AVR.19@137.929,67.557 ; 137.668,66.927 cw(c138.559,66.927) AVR.19@137.929,67.557 ; 137.668,66.927 cw(c138.559,66.927) AVR.19@137.929,67.557 ; 137.668,66.927 cw(c138.559,66.927) AVR.19@137.929,67.557
NetJP3_4: AVR.18 PD0~PD7.4 | length 56.1
  Top Layer w0.254: PD0~PD7.4@134.112,62.992 135.128,64.008 ; AVR.18@135.128,67.818 135.128,64.008 ; PD0~PD7.4@134.124,63.361 ccw(c134.15,64.157) 134.714,63.594 ; PD0~PD7.4@134.124,63.361 ccw(c134.15,64.157) 134.714,63.594 ; PD0~PD7.4@134.124,63.361 ccw(c134.15,64.157) 134.714,63.594 ; PD0~PD7.4@134.124,63.361 ccw(c134.15,64.157) 134.714,63.594 ; PD0~PD7.4@134.124,63.361 ccw(c134.15,64.157) 134.714,63.594 ; PD0~PD7.4@134.124,63.361 ccw(c134.15,64.157) 134.714,63.594 ; PD0~PD7.4@134.124,63.361 ccw(c134.15,64.157) 134.714,63.594 ; PD0~PD7.4@134.132,63.615 ccw(c134.177,64.959) 135.128,64.008 ; PD0~PD7.4@134.132,63.615 ccw(c134.177,64.959) 135.128,64.008 ; PD0~PD7.4@134.132,63.615 ccw(c134.177,64.959) 135.128,64.008 ; PD0~PD7.4@134.132,63.615 ccw(c134.177,64.959) 135.128,64.008 ; PD0~PD7.4@134.132,63.615 ccw(c134.177,64.959) 135.128,64.008 ; PD0~PD7.4@134.132,63.615 ccw(c134.177,64.959) 135.128,64.008 ; PD0~PD7.4@134.132,63.615 ccw(c134.177,64.959) 135.128,64.008 ; PD0~PD7.4@134.481,63.004 cw(c135.277,63.03) 134.714,63.594 ; PD0~PD7.4@134.481,63.004 cw(c135.277,63.03) 134.714,63.594 ; PD0~PD7.4@134.481,63.004 cw(c135.277,63.03) 134.714,63.594 ; PD0~PD7.4@134.481,63.004 cw(c135.277,63.03) 134.714,63.594 ; PD0~PD7.4@134.481,63.004 cw(c135.277,63.03) 134.714,63.594 ; PD0~PD7.4@134.481,63.004 cw(c135.277,63.03) 134.714,63.594 ; PD0~PD7.4@134.481,63.004 cw(c135.277,63.03) 134.714,63.594 ; AVR.18@134.687,67.377 cw(c133.624,66.314) 135.128,66.314 ; AVR.18@134.687,67.377 cw(c133.624,66.314) 135.128,66.314 ; AVR.18@134.687,67.377 cw(c133.624,66.314) 135.128,66.314 ; AVR.18@134.687,67.377 cw(c133.624,66.314) 135.128,66.314 ; AVR.18@134.687,67.377 cw(c133.624,66.314) 135.128,66.314 ; AVR.18@134.687,67.377 cw(c133.624,66.314) 135.128,66.314 ; AVR.18@134.687,67.377 cw(c133.624,66.314) 135.128,66.314 ; PD0~PD7.4@134.735,63.012 cw(c136.079,63.057) 135.128,64.008 ; PD0~PD7.4@134.735,63.012 cw(c136.079,63.057) 135.128,64.008 ; PD0~PD7.4@134.735,63.012 cw(c136.079,63.057) 135.128,64.008 ; PD0~PD7.4@134.735,63.012 cw(c136.079,63.057) 135.128,64.008 ; PD0~PD7.4@134.735,63.012 cw(c136.079,63.057) 135.128,64.008 ; PD0~PD7.4@134.735,63.012 cw(c136.079,63.057) 135.128,64.008 ; PD0~PD7.4@134.735,63.012 cw(c136.079,63.057) 135.128,64.008 ; AVR.18@134.867,67.557 cw(c134.237,66.927) 135.128,66.927 ; AVR.18@134.867,67.557 cw(c134.237,66.927) 135.128,66.927 ; AVR.18@134.867,67.557 cw(c134.237,66.927) 135.128,66.927 ; AVR.18@134.867,67.557 cw(c134.237,66.927) 135.128,66.927 ; AVR.18@134.867,67.557 cw(c134.237,66.927) 135.128,66.927 ; AVR.18@134.867,67.557 cw(c134.237,66.927) 135.128,66.927 ; AVR.18@134.867,67.557 cw(c134.237,66.927) 135.128,66.927 ; 135.128,66.314 cw(c136.632,66.314) AVR.18@135.569,67.377 ; 135.128,66.314 cw(c136.632,66.314) AVR.18@135.569,67.377 ; 135.128,66.314 cw(c136.632,66.314) AVR.18@135.569,67.377 ; 135.128,66.314 cw(c136.632,66.314) AVR.18@135.569,67.377 ; 135.128,66.314 cw(c136.632,66.314) AVR.18@135.569,67.377 ; 135.128,66.314 cw(c136.632,66.314) AVR.18@135.569,67.377 ; 135.128,66.314 cw(c136.632,66.314) AVR.18@135.569,67.377 ; 135.128,66.927 cw(c136.019,66.927) AVR.18@135.389,67.557 ; 135.128,66.927 cw(c136.019,66.927) AVR.18@135.389,67.557 ; 135.128,66.927 cw(c136.019,66.927) AVR.18@135.389,67.557 ; 135.128,66.927 cw(c136.019,66.927) AVR.18@135.389,67.557 ; 135.128,66.927 cw(c136.019,66.927) AVR.18@135.389,67.557 ; 135.128,66.927 cw(c136.019,66.927) AVR.18@135.389,67.557 ; 135.128,66.927 cw(c136.019,66.927) AVR.18@135.389,67.557
NetJP3_5: AVR.17 PD0~PD7.5 | length 56.1
  Top Layer w0.254: PD0~PD7.5@131.572,62.992 132.588,64.008 ; AVR.17@132.588,67.818 132.588,64.008 ; PD0~PD7.5@131.584,63.361 ccw(c131.61,64.157) 132.174,63.594 ; PD0~PD7.5@131.584,63.361 ccw(c131.61,64.157) 132.174,63.594 ; PD0~PD7.5@131.584,63.361 ccw(c131.61,64.157) 132.174,63.594 ; PD0~PD7.5@131.584,63.361 ccw(c131.61,64.157) 132.174,63.594 ; PD0~PD7.5@131.584,63.361 ccw(c131.61,64.157) 132.174,63.594 ; PD0~PD7.5@131.584,63.361 ccw(c131.61,64.157) 132.174,63.594 ; PD0~PD7.5@131.584,63.361 ccw(c131.61,64.157) 132.174,63.594 ; PD0~PD7.5@131.592,63.615 ccw(c131.637,64.959) 132.588,64.008 ; PD0~PD7.5@131.592,63.615 ccw(c131.637,64.959) 132.588,64.008 ; PD0~PD7.5@131.592,63.615 ccw(c131.637,64.959) 132.588,64.008 ; PD0~PD7.5@131.592,63.615 ccw(c131.637,64.959) 132.588,64.008 ; PD0~PD7.5@131.592,63.615 ccw(c131.637,64.959) 132.588,64.008 ; PD0~PD7.5@131.592,63.615 ccw(c131.637,64.959) 132.588,64.008 ; PD0~PD7.5@131.592,63.615 ccw(c131.637,64.959) 132.588,64.008 ; PD0~PD7.5@131.941,63.004 cw(c132.737,63.03) 132.174,63.594 ; PD0~PD7.5@131.941,63.004 cw(c132.737,63.03) 132.174,63.594 ; PD0~PD7.5@131.941,63.004 cw(c132.737,63.03) 132.174,63.594 ; PD0~PD7.5@131.941,63.004 cw(c132.737,63.03) 132.174,63.594 ; PD0~PD7.5@131.941,63.004 cw(c132.737,63.03) 132.174,63.594 ; PD0~PD7.5@131.941,63.004 cw(c132.737,63.03) 132.174,63.594 ; PD0~PD7.5@131.941,63.004 cw(c132.737,63.03) 132.174,63.594 ; AVR.17@132.147,67.377 cw(c131.084,66.314) 132.588,66.314 ; AVR.17@132.147,67.377 cw(c131.084,66.314) 132.588,66.314 ; AVR.17@132.147,67.377 cw(c131.084,66.314) 132.588,66.314 ; AVR.17@132.147,67.377 cw(c131.084,66.314) 132.588,66.314 ; AVR.17@132.147,67.377 cw(c131.084,66.314) 132.588,66.314 ; AVR.17@132.147,67.377 cw(c131.084,66.314) 132.588,66.314 ; AVR.17@132.147,67.377 cw(c131.084,66.314) 132.588,66.314 ; PD0~PD7.5@132.195,63.012 cw(c133.539,63.057) 132.588,64.008 ; PD0~PD7.5@132.195,63.012 cw(c133.539,63.057) 132.588,64.008 ; PD0~PD7.5@132.195,63.012 cw(c133.539,63.057) 132.588,64.008 ; PD0~PD7.5@132.195,63.012 cw(c133.539,63.057) 132.588,64.008 ; PD0~PD7.5@132.195,63.012 cw(c133.539,63.057) 132.588,64.008 ; PD0~PD7.5@132.195,63.012 cw(c133.539,63.057) 132.588,64.008 ; PD0~PD7.5@132.195,63.012 cw(c133.539,63.057) 132.588,64.008 ; AVR.17@132.327,67.557 cw(c131.697,66.927) 132.588,66.927 ; AVR.17@132.327,67.557 cw(c131.697,66.927) 132.588,66.927 ; AVR.17@132.327,67.557 cw(c131.697,66.927) 132.588,66.927 ; AVR.17@132.327,67.557 cw(c131.697,66.927) 132.588,66.927 ; AVR.17@132.327,67.557 cw(c131.697,66.927) 132.588,66.927 ; AVR.17@132.327,67.557 cw(c131.697,66.927) 132.588,66.927 ; AVR.17@132.327,67.557 cw(c131.697,66.927) 132.588,66.927 ; 132.588,66.314 cw(c134.092,66.314) AVR.17@133.029,67.377 ; 132.588,66.314 cw(c134.092,66.314) AVR.17@133.029,67.377 ; 132.588,66.314 cw(c134.092,66.314) AVR.17@133.029,67.377 ; 132.588,66.314 cw(c134.092,66.314) AVR.17@133.029,67.377 ; 132.588,66.314 cw(c134.092,66.314) AVR.17@133.029,67.377 ; 132.588,66.314 cw(c134.092,66.314) AVR.17@133.029,67.377 ; 132.588,66.314 cw(c134.092,66.314) AVR.17@133.029,67.377 ; 132.588,66.927 cw(c133.479,66.927) AVR.17@132.849,67.557 ; 132.588,66.927 cw(c133.479,66.927) AVR.17@132.849,67.557 ; 132.588,66.927 cw(c133.479,66.927) AVR.17@132.849,67.557 ; 132.588,66.927 cw(c133.479,66.927) AVR.17@132.849,67.557 ; 132.588,66.927 cw(c133.479,66.927) AVR.17@132.849,67.557 ; 132.588,66.927 cw(c133.479,66.927) AVR.17@132.849,67.557 ; 132.588,66.927 cw(c133.479,66.927) AVR.17@132.849,67.557
NetJP3_6: AVR.16 PD0~PD7.6 | length 56.1
  Top Layer w0.254: PD0~PD7.6@129.032,62.992 130.048,64.008 ; AVR.16@130.048,67.818 130.048,64.008 ; PD0~PD7.6@129.044,63.361 ccw(c129.07,64.157) 129.634,63.594 ; PD0~PD7.6@129.044,63.361 ccw(c129.07,64.157) 129.634,63.594 ; PD0~PD7.6@129.044,63.361 ccw(c129.07,64.157) 129.634,63.594 ; PD0~PD7.6@129.044,63.361 ccw(c129.07,64.157) 129.634,63.594 ; PD0~PD7.6@129.044,63.361 ccw(c129.07,64.157) 129.634,63.594 ; PD0~PD7.6@129.044,63.361 ccw(c129.07,64.157) 129.634,63.594 ; PD0~PD7.6@129.044,63.361 ccw(c129.07,64.157) 129.634,63.594 ; PD0~PD7.6@129.052,63.615 ccw(c129.097,64.959) 130.048,64.008 ; PD0~PD7.6@129.052,63.615 ccw(c129.097,64.959) 130.048,64.008 ; PD0~PD7.6@129.052,63.615 ccw(c129.097,64.959) 130.048,64.008 ; PD0~PD7.6@129.052,63.615 ccw(c129.097,64.959) 130.048,64.008 ; PD0~PD7.6@129.052,63.615 ccw(c129.097,64.959) 130.048,64.008 ; PD0~PD7.6@129.052,63.615 ccw(c129.097,64.959) 130.048,64.008 ; PD0~PD7.6@129.052,63.615 ccw(c129.097,64.959) 130.048,64.008 ; PD0~PD7.6@129.401,63.004 cw(c130.197,63.03) 129.634,63.594 ; PD0~PD7.6@129.401,63.004 cw(c130.197,63.03) 129.634,63.594 ; PD0~PD7.6@129.401,63.004 cw(c130.197,63.03) 129.634,63.594 ; PD0~PD7.6@129.401,63.004 cw(c130.197,63.03) 129.634,63.594 ; PD0~PD7.6@129.401,63.004 cw(c130.197,63.03) 129.634,63.594 ; PD0~PD7.6@129.401,63.004 cw(c130.197,63.03) 129.634,63.594 ; PD0~PD7.6@129.401,63.004 cw(c130.197,63.03) 129.634,63.594 ; AVR.16@129.607,67.377 cw(c128.544,66.314) 130.048,66.314 ; AVR.16@129.607,67.377 cw(c128.544,66.314) 130.048,66.314 ; AVR.16@129.607,67.377 cw(c128.544,66.314) 130.048,66.314 ; AVR.16@129.607,67.377 cw(c128.544,66.314) 130.048,66.314 ; AVR.16@129.607,67.377 cw(c128.544,66.314) 130.048,66.314 ; AVR.16@129.607,67.377 cw(c128.544,66.314) 130.048,66.314 ; AVR.16@129.607,67.377 cw(c128.544,66.314) 130.048,66.314 ; PD0~PD7.6@129.655,63.012 cw(c130.999,63.057) 130.048,64.008 ; PD0~PD7.6@129.655,63.012 cw(c130.999,63.057) 130.048,64.008 ; PD0~PD7.6@129.655,63.012 cw(c130.999,63.057) 130.048,64.008 ; PD0~PD7.6@129.655,63.012 cw(c130.999,63.057) 130.048,64.008 ; PD0~PD7.6@129.655,63.012 cw(c130.999,63.057) 130.048,64.008 ; PD0~PD7.6@129.655,63.012 cw(c130.999,63.057) 130.048,64.008 ; PD0~PD7.6@129.655,63.012 cw(c130.999,63.057) 130.048,64.008 ; AVR.16@129.787,67.557 cw(c129.157,66.927) 130.048,66.927 ; AVR.16@129.787,67.557 cw(c129.157,66.927) 130.048,66.927 ; AVR.16@129.787,67.557 cw(c129.157,66.927) 130.048,66.927 ; AVR.16@129.787,67.557 cw(c129.157,66.927) 130.048,66.927 ; AVR.16@129.787,67.557 cw(c129.157,66.927) 130.048,66.927 ; AVR.16@129.787,67.557 cw(c129.157,66.927) 130.048,66.927 ; AVR.16@129.787,67.557 cw(c129.157,66.927) 130.048,66.927 ; 130.048,66.314 cw(c131.552,66.314) AVR.16@130.489,67.377 ; 130.048,66.314 cw(c131.552,66.314) AVR.16@130.489,67.377 ; 130.048,66.314 cw(c131.552,66.314) AVR.16@130.489,67.377 ; 130.048,66.314 cw(c131.552,66.314) AVR.16@130.489,67.377 ; 130.048,66.314 cw(c131.552,66.314) AVR.16@130.489,67.377 ; 130.048,66.314 cw(c131.552,66.314) AVR.16@130.489,67.377 ; 130.048,66.314 cw(c131.552,66.314) AVR.16@130.489,67.377 ; 130.048,66.927 cw(c130.939,66.927) AVR.16@130.309,67.557 ; 130.048,66.927 cw(c130.939,66.927) AVR.16@130.309,67.557 ; 130.048,66.927 cw(c130.939,66.927) AVR.16@130.309,67.557 ; 130.048,66.927 cw(c130.939,66.927) AVR.16@130.309,67.557 ; 130.048,66.927 cw(c130.939,66.927) AVR.16@130.309,67.557 ; 130.048,66.927 cw(c130.939,66.927) AVR.16@130.309,67.557 ; 130.048,66.927 cw(c130.939,66.927) AVR.16@130.309,67.557
NetJP3_7: AVR.15 PD0~PD7.7 | length 56.1
  Top Layer w0.254: PD0~PD7.7@126.492,62.992 127.508,64.008 ; AVR.15@127.508,67.818 127.508,64.008 ; PD0~PD7.7@126.504,63.361 ccw(c126.53,64.157) 127.094,63.594 ; PD0~PD7.7@126.504,63.361 ccw(c126.53,64.157) 127.094,63.594 ; PD0~PD7.7@126.504,63.361 ccw(c126.53,64.157) 127.094,63.594 ; PD0~PD7.7@126.504,63.361 ccw(c126.53,64.157) 127.094,63.594 ; PD0~PD7.7@126.504,63.361 ccw(c126.53,64.157) 127.094,63.594 ; PD0~PD7.7@126.504,63.361 ccw(c126.53,64.157) 127.094,63.594 ; PD0~PD7.7@126.504,63.361 ccw(c126.53,64.157) 127.094,63.594 ; PD0~PD7.7@126.512,63.615 ccw(c126.557,64.959) 127.508,64.008 ; PD0~PD7.7@126.512,63.615 ccw(c126.557,64.959) 127.508,64.008 ; PD0~PD7.7@126.512,63.615 ccw(c126.557,64.959) 127.508,64.008 ; PD0~PD7.7@126.512,63.615 ccw(c126.557,64.959) 127.508,64.008 ; PD0~PD7.7@126.512,63.615 ccw(c126.557,64.959) 127.508,64.008 ; PD0~PD7.7@126.512,63.615 ccw(c126.557,64.959) 127.508,64.008 ; PD0~PD7.7@126.512,63.615 ccw(c126.557,64.959) 127.508,64.008 ; PD0~PD7.7@126.861,63.004 cw(c127.657,63.03) 127.094,63.594 ; PD0~PD7.7@126.861,63.004 cw(c127.657,63.03) 127.094,63.594 ; PD0~PD7.7@126.861,63.004 cw(c127.657,63.03) 127.094,63.594 ; PD0~PD7.7@126.861,63.004 cw(c127.657,63.03) 127.094,63.594 ; PD0~PD7.7@126.861,63.004 cw(c127.657,63.03) 127.094,63.594 ; PD0~PD7.7@126.861,63.004 cw(c127.657,63.03) 127.094,63.594 ; PD0~PD7.7@126.861,63.004 cw(c127.657,63.03) 127.094,63.594 ; AVR.15@127.067,67.377 cw(c126.004,66.314) 127.508,66.314 ; AVR.15@127.067,67.377 cw(c126.004,66.314) 127.508,66.314 ; AVR.15@127.067,67.377 cw(c126.004,66.314) 127.508,66.314 ; AVR.15@127.067,67.377 cw(c126.004,66.314) 127.508,66.314 ; AVR.15@127.067,67.377 cw(c126.004,66.314) 127.508,66.314 ; AVR.15@127.067,67.377 cw(c126.004,66.314) 127.508,66.314 ; AVR.15@127.067,67.377 cw(c126.004,66.314) 127.508,66.314 ; PD0~PD7.7@127.115,63.012 cw(c128.459,63.057) 127.508,64.008 ; PD0~PD7.7@127.115,63.012 cw(c128.459,63.057) 127.508,64.008 ; PD0~PD7.7@127.115,63.012 cw(c128.459,63.057) 127.508,64.008 ; PD0~PD7.7@127.115,63.012 cw(c128.459,63.057) 127.508,64.008 ; PD0~PD7.7@127.115,63.012 cw(c128.459,63.057) 127.508,64.008 ; PD0~PD7.7@127.115,63.012 cw(c128.459,63.057) 127.508,64.008 ; PD0~PD7.7@127.115,63.012 cw(c128.459,63.057) 127.508,64.008 ; AVR.15@127.247,67.557 cw(c126.617,66.927) 127.508,66.927 ; AVR.15@127.247,67.557 cw(c126.617,66.927) 127.508,66.927 ; AVR.15@127.247,67.557 cw(c126.617,66.927) 127.508,66.927 ; AVR.15@127.247,67.557 cw(c126.617,66.927) 127.508,66.927 ; AVR.15@127.247,67.557 cw(c126.617,66.927) 127.508,66.927 ; AVR.15@127.247,67.557 cw(c126.617,66.927) 127.508,66.927 ; AVR.15@127.247,67.557 cw(c126.617,66.927) 127.508,66.927 ; 127.508,66.314 cw(c129.012,66.314) AVR.15@127.949,67.377 ; 127.508,66.314 cw(c129.012,66.314) AVR.15@127.949,67.377 ; 127.508,66.314 cw(c129.012,66.314) AVR.15@127.949,67.377 ; 127.508,66.314 cw(c129.012,66.314) AVR.15@127.949,67.377 ; 127.508,66.314 cw(c129.012,66.314) AVR.15@127.949,67.377 ; 127.508,66.314 cw(c129.012,66.314) AVR.15@127.949,67.377 ; 127.508,66.314 cw(c129.012,66.314) AVR.15@127.949,67.377 ; 127.508,66.927 cw(c128.399,66.927) AVR.15@127.769,67.557 ; 127.508,66.927 cw(c128.399,66.927) AVR.15@127.769,67.557 ; 127.508,66.927 cw(c128.399,66.927) AVR.15@127.769,67.557 ; 127.508,66.927 cw(c128.399,66.927) AVR.15@127.769,67.557 ; 127.508,66.927 cw(c128.399,66.927) AVR.15@127.769,67.557 ; 127.508,66.927 cw(c128.399,66.927) AVR.15@127.769,67.557 ; 127.508,66.927 cw(c128.399,66.927) AVR.15@127.769,67.557
NetJP3_8: AVR.14 PD0~PD7.8 | length 56.1
  Top Layer w0.254: PD0~PD7.8@123.952,62.992 124.968,64.008 ; AVR.14@124.968,67.818 124.968,64.008 ; PD0~PD7.8@123.964,63.361 ccw(c123.99,64.157) 124.554,63.594 ; PD0~PD7.8@123.964,63.361 ccw(c123.99,64.157) 124.554,63.594 ; PD0~PD7.8@123.964,63.361 ccw(c123.99,64.157) 124.554,63.594 ; PD0~PD7.8@123.964,63.361 ccw(c123.99,64.157) 124.554,63.594 ; PD0~PD7.8@123.964,63.361 ccw(c123.99,64.157) 124.554,63.594 ; PD0~PD7.8@123.964,63.361 ccw(c123.99,64.157) 124.554,63.594 ; PD0~PD7.8@123.964,63.361 ccw(c123.99,64.157) 124.554,63.594 ; PD0~PD7.8@123.972,63.615 ccw(c124.017,64.959) 124.968,64.008 ; PD0~PD7.8@123.972,63.615 ccw(c124.017,64.959) 124.968,64.008 ; PD0~PD7.8@123.972,63.615 ccw(c124.017,64.959) 124.968,64.008 ; PD0~PD7.8@123.972,63.615 ccw(c124.017,64.959) 124.968,64.008 ; PD0~PD7.8@123.972,63.615 ccw(c124.017,64.959) 124.968,64.008 ; PD0~PD7.8@123.972,63.615 ccw(c124.017,64.959) 124.968,64.008 ; PD0~PD7.8@123.972,63.615 ccw(c124.017,64.959) 124.968,64.008 ; PD0~PD7.8@124.321,63.004 cw(c125.117,63.03) 124.554,63.594 ; PD0~PD7.8@124.321,63.004 cw(c125.117,63.03) 124.554,63.594 ; PD0~PD7.8@124.321,63.004 cw(c125.117,63.03) 124.554,63.594 ; PD0~PD7.8@124.321,63.004 cw(c125.117,63.03) 124.554,63.594 ; PD0~PD7.8@124.321,63.004 cw(c125.117,63.03) 124.554,63.594 ; PD0~PD7.8@124.321,63.004 cw(c125.117,63.03) 124.554,63.594 ; PD0~PD7.8@124.321,63.004 cw(c125.117,63.03) 124.554,63.594 ; AVR.14@124.527,67.377 cw(c123.464,66.314) 124.968,66.314 ; AVR.14@124.527,67.377 cw(c123.464,66.314) 124.968,66.314 ; AVR.14@124.527,67.377 cw(c123.464,66.314) 124.968,66.314 ; AVR.14@124.527,67.377 cw(c123.464,66.314) 124.968,66.314 ; AVR.14@124.527,67.377 cw(c123.464,66.314) 124.968,66.314 ; AVR.14@124.527,67.377 cw(c123.464,66.314) 124.968,66.314 ; AVR.14@124.527,67.377 cw(c123.464,66.314) 124.968,66.314 ; PD0~PD7.8@124.575,63.012 cw(c125.919,63.057) 124.968,64.008 ; PD0~PD7.8@124.575,63.012 cw(c125.919,63.057) 124.968,64.008 ; PD0~PD7.8@124.575,63.012 cw(c125.919,63.057) 124.968,64.008 ; PD0~PD7.8@124.575,63.012 cw(c125.919,63.057) 124.968,64.008 ; PD0~PD7.8@124.575,63.012 cw(c125.919,63.057) 124.968,64.008 ; PD0~PD7.8@124.575,63.012 cw(c125.919,63.057) 124.968,64.008 ; PD0~PD7.8@124.575,63.012 cw(c125.919,63.057) 124.968,64.008 ; AVR.14@124.707,67.557 cw(c124.077,66.927) 124.968,66.927 ; AVR.14@124.707,67.557 cw(c124.077,66.927) 124.968,66.927 ; AVR.14@124.707,67.557 cw(c124.077,66.927) 124.968,66.927 ; AVR.14@124.707,67.557 cw(c124.077,66.927) 124.968,66.927 ; AVR.14@124.707,67.557 cw(c124.077,66.927) 124.968,66.927 ; AVR.14@124.707,67.557 cw(c124.077,66.927) 124.968,66.927 ; AVR.14@124.707,67.557 cw(c124.077,66.927) 124.968,66.927 ; 124.968,66.314 cw(c126.472,66.314) AVR.14@125.409,67.377 ; 124.968,66.314 cw(c126.472,66.314) AVR.14@125.409,67.377 ; 124.968,66.314 cw(c126.472,66.314) AVR.14@125.409,67.377 ; 124.968,66.314 cw(c126.472,66.314) AVR.14@125.409,67.377 ; 124.968,66.314 cw(c126.472,66.314) AVR.14@125.409,67.377 ; 124.968,66.314 cw(c126.472,66.314) AVR.14@125.409,67.377 ; 124.968,66.314 cw(c126.472,66.314) AVR.14@125.409,67.377 ; 124.968,66.927 cw(c125.859,66.927) AVR.14@125.229,67.557 ; 124.968,66.927 cw(c125.859,66.927) AVR.14@125.229,67.557 ; 124.968,66.927 cw(c125.859,66.927) AVR.14@125.229,67.557 ; 124.968,66.927 cw(c125.859,66.927) AVR.14@125.229,67.557 ; 124.968,66.927 cw(c125.859,66.927) AVR.14@125.229,67.557 ; 124.968,66.927 cw(c125.859,66.927) AVR.14@125.229,67.557 ; 124.968,66.927 cw(c125.859,66.927) AVR.14@125.229,67.557
NetLED_1: 470.2 LED.1 | length 46.3
  Top Layer w0.254: 470.2@135.124,49.275 139.32,49.275 139.7,49.655 ; LED.1@139.7,50.8 139.7,49.655 ; 470.2@135.412,48.988 cw(c136.105,48.294) 136.105,49.275 ; 470.2@135.412,48.988 cw(c136.105,48.294) 136.105,49.275 ; 470.2@135.412,48.988 cw(c136.105,48.294) 136.105,49.275 ; 470.2@135.412,48.988 cw(c136.105,48.294) 136.105,49.275 ; 470.2@135.412,48.988 cw(c136.105,48.294) 136.105,49.275 ; 470.2@135.412,48.988 cw(c136.105,48.294) 136.105,49.275 ; 470.2@135.412,48.988 cw(c136.105,48.294) 136.105,49.275 ; 470.2@135.412,49.562 ccw(c136.105,50.256) 136.105,49.275 ; 470.2@135.412,49.562 ccw(c136.105,50.256) 136.105,49.275 ; 470.2@135.412,49.562 ccw(c136.105,50.256) 136.105,49.275 ; 470.2@135.412,49.562 ccw(c136.105,50.256) 136.105,49.275 ; 470.2@135.412,49.562 ccw(c136.105,50.256) 136.105,49.275 ; 470.2@135.412,49.562 ccw(c136.105,50.256) 136.105,49.275 ; 470.2@135.412,49.562 ccw(c136.105,50.256) 136.105,49.275 ; 470.2@135.591,48.808 cw(c136.719,47.681) 136.719,49.275 ; 470.2@135.591,48.808 cw(c136.719,47.681) 136.719,49.275 ; 470.2@135.591,48.808 cw(c136.719,47.681) 136.719,49.275 ; 470.2@135.591,48.808 cw(c136.719,47.681) 136.719,49.275 ; 470.2@135.591,48.808 cw(c136.719,47.681) 136.719,49.275 ; 470.2@135.591,48.808 cw(c136.719,47.681) 136.719,49.275 ; 470.2@135.591,48.808 cw(c136.719,47.681) 136.719,49.275 ; 470.2@135.591,49.742 ccw(c136.719,50.869) 136.719,49.275 ; 470.2@135.591,49.742 ccw(c136.719,50.869) 136.719,49.275 ; 470.2@135.591,49.742 ccw(c136.719,50.869) 136.719,49.275 ; 470.2@135.591,49.742 ccw(c136.719,50.869) 136.719,49.275 ; 470.2@135.591,49.742 ccw(c136.719,50.869) 136.719,49.275 ; 470.2@135.591,49.742 ccw(c136.719,50.869) 136.719,49.275 ; 470.2@135.591,49.742 ccw(c136.719,50.869) 136.719,49.275 ; LED.1@139.359,50.423 cw(c138.664,49.655) 139.7,49.655 ; LED.1@139.359,50.423 cw(c138.664,49.655) 139.7,49.655 ; LED.1@139.359,50.423 cw(c138.664,49.655) 139.7,49.655 ; LED.1@139.359,50.423 cw(c138.664,49.655) 139.7,49.655 ; LED.1@139.359,50.423 cw(c138.664,49.655) 139.7,49.655 ; LED.1@139.359,50.423 cw(c138.664,49.655) 139.7,49.655 ; LED.1@139.359,50.423 cw(c138.664,49.655) 139.7,49.655 ; 139.7,49.655 cw(c140.736,49.655) LED.1@140.041,50.423 ; 139.7,49.655 cw(c140.736,49.655) LED.1@140.041,50.423 ; 139.7,49.655 cw(c140.736,49.655) LED.1@140.041,50.423 ; 139.7,49.655 cw(c140.736,49.655) LED.1@140.041,50.423 ; 139.7,49.655 cw(c140.736,49.655) LED.1@140.041,50.423 ; 139.7,49.655 cw(c140.736,49.655) LED.1@140.041,50.423 ; 139.7,49.655 cw(c140.736,49.655) LED.1@140.041,50.423